# Altium PCB TIDA-00620.PcbDoc (part 2 of 2)
Units mil, origin at the board's own origin, x right, y up, seen from the top; angles counter-clockwise.
Board outline 3000 x 1500 mil, 2 copper layers (Top Layer, Bottom Layer), stack 64.8 mil thick; 82 components, 49 nets, 221 pads, 316 vias.
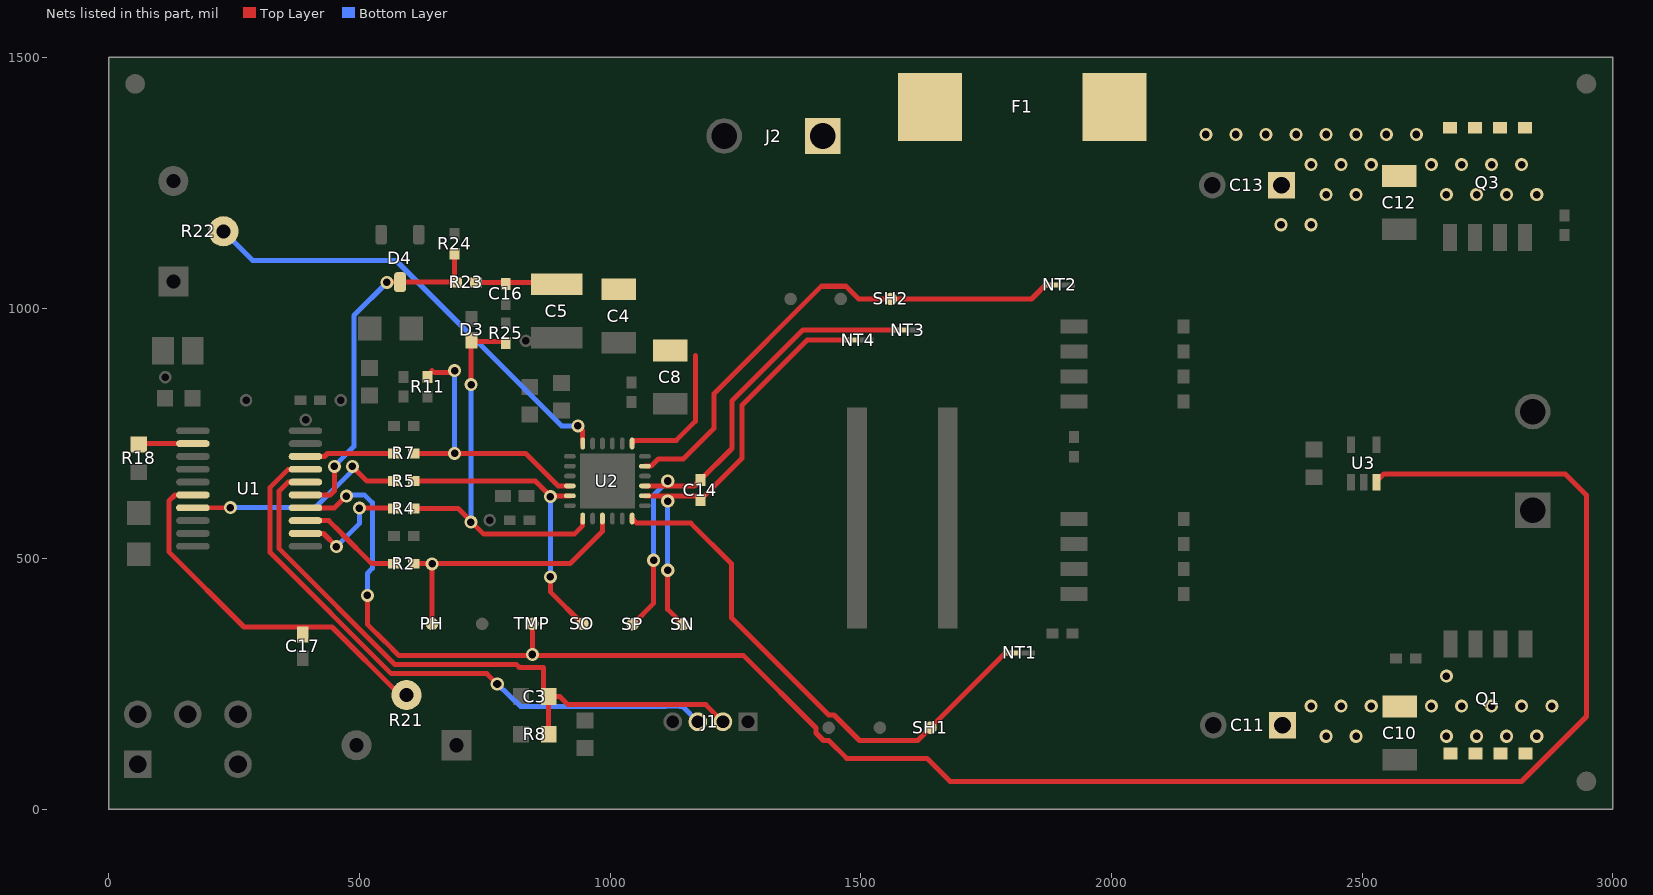
[diagram p2: the nets of this part, all layers, seen from the top]

## Via types
v1: diameter 26, hole 15, Top Layer to Bottom Layer, tented both sides, 270 vias
v2: diameter 26, hole 15, Top Layer to Bottom Layer, 39 vias
v3: diameter 19.68, hole 7.87, Top Layer to Bottom Layer, 5 vias
v4: diameter 40, hole 20, Top Layer to Bottom Layer, 1 vias
v5: diameter 26, hole 16, Top Layer to Bottom Layer, 1 vias

## Nets (pads, with @x,y where several pads share a name; then routed paths per layer and width w, separated by ;. In a path a pad name is that pad's centre, name@x,y a point inside that pad or via, vN(x,y) a via of type N, cw(c..) or ccw(c..) an arc to the next point about the centre after c; other vN are vias at no path point) (continued)
PH/IN1_DRV: PH.1 R2.1 U2.15 | length 546.6
  Top Layer w10: R2.1@610.32,490 920.24,490 984.84,554.6 U2.15@984.84,580.2 ; PH.1@645,370 v2(645,489.69)
PH/IN1_MSP: R2.2 U1.13 | length 210.9
  Top Layer w10: U1.13@392.52,576.02 438.98,576.02 464.63,550.37 ; 465.51,549.49 525,490 R2.2@569,490
RESET: C3.1 J1.2 R8.1 U1.16 | length 1301.2
  Top Layer w10: U1.16@392.52,652.8 357.8,652.8 340,635 340,520 571.25,288.75 813.81,288.75 819.43,283.13 866.87,283.13 C3.1@866.87,225 ; R8.1@877.56,150 C3.1@877.56,225 900,225 916.01,208.99 1191.01,208.99 J1.2@1225,175
S_N: C14.2 NT4.1 SN.1 U2.20 | length 874.3
  Top Layer w10: U2.20@1069.49,625.47 1171.84,625.47 C14.2@1180,617.31 1180.49,617.31 1202.72,639.54 1202.72,640.03 1262.91,700.23 1262.91,806.19 1392.72,936 NT4.1@1480,936 ; v2(1115,477) 1115,399 SN.1@1145,369
  Top Layer w15: v2(1115,615) v2@1115,622.66
  Bottom Layer w10: v2(1115,477) v2(1115,615)
S_P: C14.1 NT3.1 SP.1 U2.21 | length 1015.9
  Top Layer w10: SP.1@1045,369 1087,411 v2(1087,497) ; U2.21@1069.49,645.16 1168.47,645.16 C14.1@1180,656.68 ; C14.1@1179.09,656.09 1242,719 ; 1242.91,719.6 1242.91,814.47 1384.44,956 NT3.1@1579,956
  Top Layer w15: v2@1115,647.97 v2(1115,655)
  Bottom Layer w10: v2(1087,497) 1087,627 v2(1115,655)
SH1: NT1.1 SH1.1 U2.18 | length 1076.7
  Top Layer w10: U2.18@1043.9,580.2 1053.09,571 1161.18,571 1242.13,490.05 1242.13,382.15 1435.9,188.37 1446.63,188.37 1497.37,137.63 1613.63,137.63 1787.87,311.87 NT1.1@1801.87,311.87
SH2: NT2.2 SH2.1 U2.23 | length 1014.7
  Top Layer w10: U2.23@1069.49,684.53 1081.78,684.53 1096.25,699 1146,699 1207.17,760.17 1207.17,829.28 1421.26,1043.37 1470.51,1043.37 1495.88,1018 1828,1018 1828.13,1018.13 1840.4,1018.13 1868.28,1046 NT2.2@1873,1046
SLEEPN_DRV: D3.1 R4.1 R25.2 U2.13 | length 801.3
  Top Layer w10: R4.1@608.37,600 697.08,600 748.14,548.94 928.62,548.94 945.47,565.79 U2.13@945.47,580.2 ; v2(723,847) 723,933 R25.2@785.32,933
  Bottom Layer w10: v2@723,573.67 v2(723,847)
  other v2: 722.33,573
SLEEPN_MSP: R4.2 U1.12 | length 259.1
  Top Layer w10: U1.12@372.52,550.43 U1.12@392.52,550.43 428.57,550.43 454,525 v2(454,524) ; v2(500,601) R4.2@570,601
  Bottom Layer w10: v2(454,524) 500,570 v2(500,601)
SNSOUT_DRV: R7.1 R11.1 U2.10 | length 557.4
  Top Layer w10: R7.1@608.37,710 v2(690,710) 831.57,710 896.41,645.16 U2.10@919.88,645.16 ; R11.1@637,866.62 645.38,875 ; 649.41,871.13 686.13,871.13 v2(690,875)
  Bottom Layer w10: v2(690,710) v2(690,875)
SNSOUT_MSP: R7.2 U1.18 | length 179
  Top Layer w10: U1.18@392.52,703.98 430.38,703.98 436.41,710 R7.2@569,710
SO_DRV: R5.1 SO.1 U2.11 | length 598.3
  Top Layer w10: R5.1@610.32,655 851,655 856.47,649.53 ; 856.51,649.53 864.06,641.99 ; 864.06,641.94 880.53,625.47 U2.11@919.88,625.47 ; v2(881,464) 881,434 SO.1@945,370
  Bottom Layer w10: v2@881,465 v2@881,621
  other v2: 881,624
SO_MSP: R5.2 U1.7 | length 442.5
  Top Layer w10: U1.7@168.11,601.61 v2(243,602) ; v2(486,684) 515,655 R5.2@567.05,655
  Bottom Layer w10: v2(243,602) 399.92,601.92 ; 399,602 412.41,602 ; 412,602 v2@485.67,675.67
SPEED: C17.1 R21.2 U1.6 | length 746.6
  Top Layer w10: U1.6@168.11,627.2 132.2,627.2 120,615 120,514 270,364 445.44,364 581.44,228 R21.2@594,228
STATUS: R18.2 U1.2 | length 108.9
  Top Layer w10: R18.2@60,731.5 61.93,729.57 U1.2@168.11,729.57
"TEMP SENSOR": TMP.1 U1.14 U3.3 | length 3967
  Top Layer w10: U1.14@392.52,601.61 450.61,601.61 v2(474,625) ; v2(516,427) 516,369.28 550.14,335.14 550.48,335.14 579,306.62 v2@845,306.62 ; TMP.1@845,370 v2@845,306.62 ; U3.3@2526.47,652.47 2543,669 2904.87,669.13 2947.13,626.87 2947.13,185.4 2817.6,55.88 1678.12,55.88 1632.12,101.88 1471.84,101.88 1436.1,137.63 1425.49,137.63 1410.63,152.49 1410.63,162.37 1266.38,306.62 v2@845,306.62
  Bottom Layer w10: v2(474,625) 475.87,626.87 510.72,626.87 525.87,611.72 525.87,480.78 515.81,470.72 515.81,427.19 v2(516,427)
  other v2: 845,309
TEST: J1.3 U1.17 | length 1208.3
  Top Layer w10: U1.17@392.52,678.39 358.11,678.39 322.13,642.4 322.13,512.6 563.85,270.87 754.13,270.87 v5(775,250)
  Bottom Layer w10: v5(775,250) 821.83,205.31 1110.65,205.31 1111.92,206.57 1138.08,206.57 1139.35,205.31 1144.69,205.31 J1.3@1175,175
VBAT: F1.1 J2.1
"VBAT MONITOR": D4.3 R23.2 R24.1 U1.15 | length 705.8
  Top Layer w10: U1.15@392.52,627.2 442.2,627.2 450,635 v2(450,684) ; v2@555.76,1051.76 D4.3@581,1051.76 R23.2@688.62,1051.76 ; R23.2@689.38,1051 R24.1@689.38,1103.76
  Bottom Layer w10: v2(450,684) 450,684.59 489.13,723.72 489.13,985.13 v2(555,1051)
VM: C4.1 C5.1 C8.1 C10.1 C11.1 C12.1 C13.1 C16.2 F1.2 Q1.5 Q1.6 Q1.7 Q1.8 Q3.5 Q3.6 Q3.7 Q3.8 R23.1 U2.1 | length 432.7
  Top Layer w10: R23.1@736.62,1051 C5.1@893.91,1051 ; U2.1@1043.9,729.8 1050.09,736 1132,736 1170,774 1170,905
  other v1: 2428,146 2488,146 2668,146 2728,146 2788,146 2848,146 2398,206 2458,206 2518,206 2638,206 2698,206 2758,206 2818,206 2878,206 2668,266 2338,1166 2398,1166 2428,1226 2488,1226 2668,1226 2728,1226 2788,1226 2848,1226 2398,1286 2458,1286 2518,1286 2638,1286 2698,1286 2758,1286 2818,1286 2188,1346 2248,1346 2308,1346 2368,1346 2428,1346 2488,1346 2548,1346 2608,1346
VREF: R22.2 U2.6 | length 906.8
  Top Layer w10: v2(936,765) 945.47,755.53 U2.6@945.47,729.8
  Bottom Layer w10: R22.2@229,1153 287.25,1094.75 573.12,1094.75 903,765 v2(936,765)
pads on no net: FID1.1 FID2.1 FID3.1 S1.1 S1.3 U1.3 U1.4 U1.8 U1.10 U1.19

## Polygon pours and split planes (outlines as drawn)
M_B on Bottom Layer "Bottom Layer-No Net 5" (solid, remove dead copper, pour order 32): 2434,706 2996.48,706 2997.48,705 2998,705.52 2998,1155 2418,1155
M_A on Bottom Layer "Bottom Layer-No Net 4" (solid, remove dead copper, pour order 30): 2444,272 2444,671 3001,671 3001,281 3002,280 2999,277 2426,277
VM on Bottom Layer "Bottom Layer-No Net 3" (solid, remove dead copper, pour order 39): 2068,1504.59 2068,4 2525,4 2528,7 2532,3 3000,3 3000,281 2999,282 3001,284 3001,295 2460,295 2459,294 2460,295 2460,1176 2994,1176 2999,1181 3000,1182 3000,1500
GND on Bottom Layer "Bottom Layer-No Net" (solid, remove dead copper, pour order 45): 2.8,1481.73 2119,1481.73 2119,-6 2.8,-6
VM on Top Layer "Top Layer-No Net 1" (solid, remove dead copper, pour order 38): 1084.57,891 1166,891 1169,894 1172,891 1172,825 1177,825 1198,846 1558,1206 1326,1206 1325,1207 870,1207 869,1207 839,1177 840,1176 840,1024 840,1001 1017,1001 1056,1001 1085.23,971.77
M_B on Top Layer "Top Layer-No Net 8" (solid, remove dead copper, pour order 35): 1980,693 1979,694 1979,1064 2128.81,1064 2154.81,1090 2437.81,1090 2516.91,1169.1 2518.83,1167.19 2997,1167.19 2997,694.19 3002,689.19
M_A on Top Layer "Top Layer-No Net" (solid, pour order 33): 1979,602 1979,297 1983,293 2947.13,293 2947.13,664.87 2939,673 2933,679 2387,679 1982,679 1979,682
VM on Top Layer "Bottom Layer-No Net 2" (solid, remove dead copper, pour order 28): 1837,1501.01 1837,1200 1970,1333 2266,1333 2276,1343 2272,1339 2276,1339 2275,1338 2275,1089.87 2452.87,1089.87 2515.91,1152.91 2583.35,1152.91 2609.43,1179 3000,1179 3000,1500
VM on Top Layer "Bottom Layer-No Net 1" (solid, remove dead copper, pour order 27): 2286,73.75 2286,294 2621,294 2625,290 2944,290 2945,291 2947.13,288.87 2947.13,85.41 2917.6,55.88 2915.72,54 2285,54
VBAT on Top Layer "Top Layer-No Net 7" (solid, remove dead copper, pour order 26): 1336,1497 1336,1229.12 1593,1229.12 1719.12,1229.12 1812,1322 1812,1495.77
GND on Top Layer "Top Layer-No Net 4" (solid, remove dead copper, pour order 43): -0.31,1509.95 -0.31,9.95 2999.69,9.95 2999.69,1509.95
NetNT3_2 on Top Layer "Top Layer-No Net 5" (solid, remove dead copper, pour order 40): 1597,319.2 1597,990 1950.54,990 1950.54,397.32 1878.24,397.32 1875.24,400.32 1795.11,320.2
VM on Top Layer "Top Layer-No Net 2" (solid, remove dead copper, pour order 14): 1989.81,1509.81 1736,1256 1685,1256 1584,1256 1396.25,1068.25 1430.5,1034 1644,1034 1671,1034 2018.81,1381.81

## Keep-outs
Keep-Out Layer:
  lines w10: 0,1500 3000,1500 3000,0 0,0 0,1500 ; 0,1500 0,1500 ; 3000,1440 3000,1440
  text ".Layer_Name" at 577,-858.49 h60

## Other copper
Top Layer:
  rectangle net VM: 2244,1333 2298,1384
  rectangle net NetNT3_2: 1597,918.93 1631,970
  rectangle net GND: 1511,916 1512,917
  rectangle net GND: 1503,892 1572,941
  rectangle net VM: 1084.57,891 1091.67,916
  text ".Layer_Name" at 577,-858.49 h60
Bottom Layer:
  rectangle net NetNT3_2: 1597,305 1873,995
  rectangle net M_A: 1980,324 2162,679
  rectangle net M_B: 1978,702 2162,1026.98
  text ".Layer_Name" at 577,-858.49 h60

## Silkscreen, mask and mechanical layers (free items; w line width, h text height)
Top Overlay:
  lines w10: 595,340 1195,340 1195,439 595,439 595,379 595,340 ; 1290,985 1638,985 1638,1100 1290,1100 1290,985 ; 1359,135 1720,135 1720,250 1359,250 1359,135
  text "GND" at 972,1158 h40
  text "VBAT" at 1546,1157 h40
  text "VREF" at 371,1096 h30 r90
  text "FAULTn" at 304,940 h30
  text "MOTB" at 2505,788 h30
  text "MOTA" at 2506,570 h30
  text "STATUS" at 146,336 h30 r90
  text "SPEED" at 419,333 h30
  text "DIRECTION" at 32,253 h30
  text "TIDA-00620 Rev E1" at 1408,45 h40
  text ".Layer_Name" at 577,-858.49 h60
Bottom Overlay:
  text ".Layer_Name" at 577,-858.49 h60
Top Paste:
  text ".Layer_Name" at 577,-858.49 h60
Bottom Paste:
  text ".Layer_Name" at 577,-858.49 h60
Top Solder:
  text ".Layer_Name" at 577,-858.49 h60
  text ".Layer_Name" at 577,-858.49 h60
Bottom Solder:
  text ".Layer_Name" at 577,-858.49 h60
Drill Guide:
  text ".Layer_Name" at 577,-858.49 h60
M1 Board Outline:
  lines w10: 0,0 0,1500 ; 0,0 0,0 ; 0,0 3000,0 3000,1500 ; 0,1500 0,1500 ; 0,1500 3000,1500 ; 3000,1500 3000,1500
  text ".Layer_Name" at 577,-858.49 h60
M2 Board Dimensions:
  rectangle: 0,-275 125,-150
  rectangle: 125,-400 500,-275
  lines w7: 0,-275 1000,-275 ; 125,-400 125,-150 ; 250,-400 250,-150 ; 500,-400 500,-150 ; 750,-400 750,-150 ; 0,-400 1000,-400 1000,-150 0,-150 0,-400
  text ".Layer_Name" at 577,-858.49 h60
M3 3D STEP Top:
  text ".Layer_Name" at 577,-858.49 h60
M4 3D STEP Bottom:
  text ".Layer_Name" at 577,-858.49 h60
M5 Assembly Top:
  lines w10: -292,-930.17 6308,-930.17 ; -292,-726.83 6310,-726.83 ; -292,-523.5 -292,-1133.5 3713,-1133.5 6310,-1133.5 6310,-523.5 -291.5,-523.5 -291.5,-1133.5 1284,-1133.5 ; 2173,-1133.5 2173,-523.5 ; 3440,-726.83 3440,-523.5 ; 4280,-726.83 4280,-523.5 ; 4902,-1140 4902,-937.17
  text "COMPONENTS MARKED 'DNP' SHOULD NOT BE POPULATED." at 1153.5,-318.5 h60
  text "ASSEMBLY VARIANT:" at 1153,-434 h60
  text ".VariantName" at 2189,-434 h60
  text "PCB VIEWED FROM TOP SIDE" at -228.5,-655.67 h60
  text "BOARD #:" at 2248,-655.67 h60
  text ".PRJ_Number" at 2793.5,-655.67 h60
  text "REV:" at 3638,-655.67 h60
  text ".PCB_Rev" at 3929.5,-655.67 h60
  text "SVN REV:" at 4476,-655.67 h60
  text ".VersionControl_RevNumber" at 4982,-655.67 h60
  text "TID #:" at 2248,-859 h60
  text ".TID" at 2793.5,-859 h60
  text "PLOT NAME =" at -228.5,-1064.34 h60
  text ".plot_File_Name" at 577,-1064.34 h60
  text "GENERATED    :" at 2250,-1064.34 h60
  text ".Print_Date" at 3119.5,-1064.34 h60
  text ".Print_Time" at 3848.5,-1064.34 h60
  text "TEXAS INSTRUMENTS" at 5113,-1064.34 h60
M6 Assembly Bottom:
  lines w10: -292.5,-727.33 6309.5,-727.33 ; -290.5,-930.67 6309.5,-930.67 ; 1115.5,-1140.5 1115.5,-937.67 ; 1737.5,-727.33 1737.5,-524 ; 2577.5,-727.33 2577.5,-524 ; 3844.5,-1134 3844.5,-524 ; 4733.5,-1134 6309,-1134 6309,-524 -292.5,-524 -292.5,-1134 2304.5,-1134 6309.5,-1134 6309.5,-524
  text "COMPONENTS MARKED 'DNP' SHOULD NOT BE POPULATED." at 6102,-318 h60
  text ".VariantName" at 5058,-434 h60
  text "ASSEMBLY VARIANT:" at 6097,-434 h60
  text ".VersionControl_RevNumber" at 1035.5,-656.17 h60
  text "SVN REV:" at 1541.5,-656.17 h60
  text ".PCB_Rev" at 2088,-656.17 h60
  text "REV:" at 2379.5,-656.17 h60
  text ".PRJ_Number" at 3224,-656.17 h60
  text "BOARD #:" at 3769.5,-656.17 h60
  text "PCB VIEWED FROM BOTTOM SIDE" at 6246,-656.17 h60
  text ".PRJ_Number" at 3224,-859.5 h60
  text "TID #:" at 3769.5,-859.5 h60
  text "TEXAS INSTRUMENTS" at 904.5,-1064.84 h60
  text ".Print_Time" at 2169,-1064.84 h60
  text ".Print_Date" at 2898,-1064.84 h60
  text "GENERATED    :" at 3767.5,-1064.84 h60
  text ".plot_File_Name" at 5440.5,-1064.84 h60
  text "PLOT NAME =" at 6246,-1064.84 h60
M9 Title Sheet:
  drawing of 57 lines, arcs and shapes, not listed
  text "1" at 739.84,8036.5 h70
  text "2" at 3235.5,8036.5 h70
  text "3" at 5724.84,8036.5 h70
  text "4" at 8231.51,8036.5 h70
  text "5" at 10730.5,8036.5 h70
  text "6" at 13235.5,8036.5 h70
  text "A" at -416.5,6893.5 h70
  text "A" at 14383.5,6893.5 h70
  text "B" at -416.5,4513.5 h70
  text "B" at 14383.5,4513.5 h70
  text "C" at -416.5,2138.5 h70
  text "C" at 14383.5,2138.5 h70
  text "PROJECT TITLE:" at 11343.5,277.5 h45
  text ".PRJ_Title" at 11393.5,144.17 h70
  text "DESIGNED FOR:" at 11343.5,-23.5 h45
  text ".PRJ_Customer" at 11393.5,-163.5 h70
  text "D" at -416.5,-231.5 h70
  text "D" at 14383.5,-231.5 h70
  text "FILE NAME:" at 11343.5,-323.5 h45
  text ".PCB_File_Name_No_Path" at 11393.5,-443.5 h70
  text "Texas Instruments (TI) and/or its licensors do not warrant the accuracy or completeness of this specification" at 6374,-605.34 h45
  text "ENGINEER:" at 11343.5,-613.5 h45
  text "LAYOUT BY:" at 12848.5,-613.5 h45
  text "or any information contained therein. TI and/or its licensors do not warrant that this design will meet" at 6329.01,-718 h45
  text ".PRJ_Engineer" at 11393.5,-768.49 h70
  text ".PCB_Layout" at 12899,-768.49 h70
  text "the specifications, will be suitable for your application or fit for any particular purpose, or will operate in" at 6329.01,-830.67 h45
  text ".Layer_Name" at 577,-858.49 h60
  text "ALTIUM DESIGNER VERSION:" at 12848.5,-923.5 h45
  text "an implementation. TI and/or its licensors do not warrant that the design is production worthy. You should" at 6329.01,-943.33 h45
  text "completely validate and test your design implementation to confirm the system functionality for your application." at 6374,-1056 h45
  text ".print_Scale" at 11393.5,-1056.83 h70
  text ".Application_BuildNumber" at 12899,-1056.83 h70
  text "1" at 739.84,-1263.5 h70
  text "2" at 3235.5,-1263.5 h70
  text "3" at 5724.84,-1263.5 h70
  text "4" at 8231.51,-1263.5 h70
  text "5" at 10730.5,-1263.5 h70
  text "6" at 13235.5,-1263.5 h70
M10 Fab Notes:
  drawing of 185 lines, arcs and shapes, not listed
  text "DESIGN INFORMATION" at 12381.02,5910 h60
  text "MIN. TRACK WIDTH:" at 11736.46,5730 h60
  text "8" at 12832.7,5730 h60
  text "MIL" at 12987.46,5730 h60
  text "MIN. CLEARANCE:" at 11736.46,5598 h60
  text "0.2" at 12772.7,5598 h60
  text "mm" at 12987.46,5598 h60
  text "MIN. VIA PAD SIZE:" at 11736.46,5466 h60
  text "24" at 12802.71,5466 h60
  text "MIL" at 12987.46,5466 h60
  text "0.05mm (2MIL)" at 12431.46,5324.29 h60
  text "MINIMUM ANNULAR RING" at 11407.23,5320 h60
  text "EXTERNAL" at 13139.46,5320 h60
  text "PER" at 11607.23,5202 h60
  text "IPC-D-275 CLASS 2 LEVEL C" at 11827.23,5202 h60
  text "MIL, HOLES" at 13315.46,5089.71 h60
  text "+/-" at 12923,5089 h60
  text "+/-" at 13777,5089 h60
  text "REGISTRATION TOLERANCES:" at 11407.23,5084 h60
  text "METAL" at 12607,5084 h60
  text "5" at 13183.2,5084 h60
  text "3" at 14016.2,5084 h60
  text "MIL" at 14132.46,5084 h60
  text "MATERIAL:" at 11332.46,4874.54 h60
  text "FR-4 High Tg" at 12318.9,4734.21 h60
  text "FR-408" at 11753.46,4725.64 h60
  text "X" at 12165.46,4725.64 h60
  text "OTHER" at 13241.46,4725.64 h60
  text "62 MIL (1.6mm) +/-10%" at 12073.56,4562.92 h60
  text "THICKNESS:" at 11407.23,4558.64 h60
  text "X" at 11945.4,4558.64 h60
  text "OTHER" at 13358.46,4558.64 h60
  text "TOLERANCE:" at 11407.23,4400.64 h60
  text "X" at 12246.53,4400.64 h60
  text "ANSI IPC-6012 TYPE 3 CLASS 2" at 12433.48,4400.64 h60
  text "OTHER +/-" at 12433.46,4244.64 h60
  text "BOW & TWIST:" at 11407.23,4087.64 h60
  text "X" at 12246.53,4087.64 h60
  text "ANSI IPC-6012 TYPE 3 CLASS 2" at 12433.48,4087.64 h60
  text "OTHER +/-" at 12433.46,3929.13 h60
  text "DRILLING:" at 11332.46,3790.64 h60
  text "REFERENCE:" at 11407.23,3673.64 h60
  text "X" at 12055.46,3673.64 h60
  text "AS SHOWN" at 12242.46,3673.64 h60
  text "X" at 12956.46,3673.64 h60
  text "NC_DRILL FILES" at 13093.46,3673.64 h60
  text "PTH MIN COPPER THICKNESS:" at 11407.23,3515.64 h60
  text "X" at 12757.46,3515.64 h60
  text "1MIL" at 12894.46,3515.64 h60
  text "OTHER" at 13391.46,3515.64 h60
  text "BOARD FINISH:" at 11332.46,3356.64 h60
  text "SILKSCREEN:" at 11487.68,3238.64 h60
  text "X" at 12436.46,3238.64 h60
  text "TOP" at 12562.46,3238.64 h60
  text "X" at 12946.46,3238.64 h60
  text "BOTTOM" at 13073.46,3238.64 h60
  text "SILKSCREEN COLOR:" at 11487.68,3071.64 h60
  text "X" at 12435.42,3071.64 h60
  text "WHITE" at 12562.46,3071.64 h60
  text "OTHER" at 13073.46,3071.64 h60
  text "SOLDER RESIST COLOR:" at 11487.68,2901.64 h60
  text "X" at 12055.42,2742.44 h60
  text "GREEN" at 12182.46,2742.44 h60
  text "BLUE" at 12773.46,2742.44 h60
  text "OTHER" at 13311.46,2742.44 h60
  text "IMMERSION GOLD (ENIG)" at 12393.46,2553.92 h60
  text "ENEPIG" at 13731,2550.64 h60
  text "SURFACE FINISH:" at 11332.46,2549.64 h60
  text "X" at 12206.51,2549.64 h60
  text "IMM. TIN/SILVER OR EQUIV" at 11662,2392.64 h60
  text "OTHER" at 13093.46,2392.64 h60
  text "ARRAY/PANEL:" at 11332.46,2213.64 h60
  text "CUT AND TRIM PER MECH LAYER 1" at 12393.46,2209.35 h60
  text "N.C. ROUTE" at 12393.46,2057.64 h60
  text "X" at 13072.46,2057.64 h60
  text "V. SCORE" at 13259.46,2057.64 h60
  text "CERTIFICATION:" at 11332.46,1920.64 h60
  text "MATERIALS AND WORKMANSHIP FOR ALL PCBS" at 12057.46,1920.64 h60
  text "TO MEET OR EXCEED THE REQUIREMENTS OF:" at 12057.46,1822.64 h60
  text "X" at 11683.96,1686.13 h60
  text "ANSI IPC-A-600F CLASS ->" at 11822.96,1686.13 h60
  text "X" at 13462.02,1686.13 h60
  text "2" at 13580.96,1686.14 h60
  text "1" at 13265.96,1684.64 h60
  text "3" at 13934.96,1684.64 h60
  text "X" at 11686.02,1526.64 h60
  text "UL 94V-0" at 11822.96,1526.64 h60
  text "X" at 12498.02,1526.64 h60
  text "RoHS" at 12634.96,1526.64 h60
  text "OTHER" at 13279.36,1526.64 h60
  text "PER ORDER" at 13676.42,1526.64 h60
  text "ADDITIONAL REQUIREMENTS:" at 11332.46,1385.64 h60
  text "MICROSECTION:" at 11407.23,1270.64 h60
  text "YES" at 12312.96,1270.64 h60
  text "REQUIRED" at 13174.46,1114.49 h60
  text "BARE BOARD ELEC. TEST:" at 11407.23,1111.64 h60
  text "NONE" at 12712.96,1111.64 h60
  text "X" at 13047.46,1111.64 h60
  text "PER ORDER" at 13766.46,1111.64 h60
  text "MANUFACTURER'S UL:" at 11407.23,954.64 h60
  text "RAIL" at 12572.96,950.35 h60
  text "METAL" at 13064.77,950.35 h60
  text "X" at 13440,950 h60
  text "SILK" at 13576.46,950.35 h60
  text ".Layer_Name" at 577,-858.49 h60
M11 Gerber Information:
  lines w10: -292,-930.17 6308,-930.17 ; -292,-726.83 6310,-726.83 ; -292,-523.5 -292,-1133.5 3713,-1133.5 6310,-1133.5 6310,-523.5 -291.5,-523.5 -291.5,-1133.5 1284,-1133.5 ; 2173,-1133.5 2173,-523.5 ; 3440,-726.83 3440,-523.5 ; 4280,-726.83 4280,-523.5 ; 4902,-1140 4902,-937.17
  text "ALL ARTWORK VIEWED FROM TOP SIDE" at -228.5,-655.67 h60
  text "BOARD #:" at 2248,-655.67 h60
  text ".PRJ_Number" at 2793.5,-655.67 h60
  text "REV:" at 3638,-655.67 h60
  text ".PCB_Rev" at 3929.5,-655.67 h60
  text "SVN REV:" at 4476,-655.67 h60
  text ".VersionControl_RevNumber" at 4982,-655.67 h60
  text "LAYER NAME =" at -228.5,-858.49 h60
  text "TID #:" at 2248,-859 h60
  text ".TID" at 2793.5,-859 h60
  text "PLOT NAME =" at -228.5,-1064.34 h60
  text ".plot_File_Name" at 577,-1064.34 h60
  text "GENERATED    :" at 2250,-1064.34 h60
  text ".Print_Date" at 3119.5,-1064.34 h60
  text ".Print_Time" at 3848.5,-1064.34 h60
  text "TEXAS INSTRUMENTS" at 5113,-1064.34 h60
M12 Stackup:
  drawing of 191 lines, arcs and shapes, not listed
  text "Layer" at 9763.34,7818 h60
  text "Name" at 10173.26,7818 h60
  text "Material" at 11103,7818 h60
  text "Thickness" at 11962.77,7818 h60
  text "Constant" at 12612.6,7818 h60
  text "Board Layer Stack" at 13182.46,7818 h60
  text "1" at 9763.34,7698 h60
  text "Top Overlay" at 10173.26,7698 h60
  text "2" at 9763.34,7578 h60
  text "Top Solder" at 10173.26,7578 h60
  text "Solder Resist" at 11103,7578 h60
  text "0.40mil" at 11962.77,7578 h60
  text "3.5" at 12612.6,7578 h60
  text "3" at 9763.34,7458 h60
  text "Top Layer" at 10173.26,7458 h60
  text "Copper" at 11103,7458 h60
  text "2.80mil" at 11962.77,7458 h60
  text "4" at 9763.34,7338 h60
  text "Dielectric1" at 10173.26,7338 h60
  text "FR-4" at 11103,7338 h60
  text "59.20mil" at 11962.77,7338 h60
  text "4.8" at 12612.6,7338 h60
  text "5" at 9763.34,7218 h60
  text "Bottom Layer" at 10173.26,7218 h60
  text "Copper" at 11103,7218 h60
  text "2.80mil" at 11962.77,7218 h60
  text "6" at 9763.34,7098 h60
  text "Bottom Solder" at 10173.26,7098 h60
  text "Solder Resist" at 11103,7098 h60
  text "0.40mil" at 11962.77,7098 h60
  text "3.5" at 12612.6,7098 h60
  text "7" at 9763.34,6978 h60
  text "Bottom Overlay" at 10173.26,6978 h60
  text ".Layer_Name" at 577,-858.49 h60
M13 Component Bodies Top:
  text ".Layer_Name" at 577,-858.49 h60
M14 Component Bodies Bottom:
  text ".Layer_Name" at 577,-858.49 h60
M15 Courtyards Top:
  text ".Layer_Name" at 577,-858.49 h60
M16 Courtyards Bottom:
  text ".Layer_Name" at 577,-858.49 h60
Drill Drawing:
  circle w1: c5677.9,3258.91 r20.77
  lines w1: 5657.13,2241.16 5657.13,2251.55 5667.51,2261.93 5657.13,2272.32 5657.13,2282.7 5667.51,2282.7 5677.9,2272.32 5688.28,2282.7 5698.67,2282.7 5698.67,2272.32 5688.28,2261.93 5698.67,2251.55 5698.67,2241.16 5688.28,2241.16 5677.9,2251.55 5667.51,2241.16 5657.13,2241.16 ; 5657.13,2376.17 5667.51,2376.17 5667.51,2365.79 5688.28,2365.79 5688.28,2376.17 5698.67,2376.17 5698.67,2396.94 5688.28,2396.94 5688.28,2407.33 5667.51,2407.33 5667.51,2396.94 5657.13,2396.94 5657.13,2376.17 ; 5657.13,2490.41 5677.9,2500.79 5698.67,2490.41 5688.28,2511.18 5698.67,2531.95 5677.9,2521.56 5657.13,2531.95 5667.51,2511.18 5657.13,2490.41 ; 5657.13,2625.42 5667.51,2625.42 5677.9,2615.03 5688.28,2625.42 5698.67,2625.42 5688.28,2635.8 5698.67,2646.19 5688.28,2646.19 5677.9,2656.57 5667.51,2646.19 5657.13,2646.19 5667.51,2635.8 5657.13,2625.42 ; 5657.13,2781.19 5698.67,2781.19 5677.9,2739.65 5657.13,2781.19 ; 5657.13,2864.27 5698.67,2864.27 5698.67,2905.82 5657.13,2905.82 5657.13,2864.27 ; 5657.13,3009.67 5677.9,2988.9 5698.67,3009.67 5677.9,3030.44 5657.13,3009.67 ; 5657.13,3113.52 5698.67,3113.52 5698.67,3155.06 5657.13,3155.06 5657.13,3113.52 ; 5665.44,2872.58 5690.36,2872.58 5690.36,2897.51 5665.44,2897.51 5665.44,2872.58
  lines w12: 5600,2203.78 7629.11,2203.78 ; 5600,3325.38 7629.11,3325.38 ; 5948.13,2079.15 5948.13,3450 ; 6290.32,2079.15 6290.32,3450 ; 6937.06,2079.15 6937.06,3450 ; 7206.38,2079.15 7206.38,3450 ; 5600,2079.15 7629.11,2079.15 7629.11,3450 5600,3450 5600,2079.15
  text "Symbol" at 5674.77,3362.76 h72
  text "Quantity" at 5985.52,3362.76 h72
  text "Finished Hole Size" at 6327.7,3362.76 h72
  text "Plated" at 6974.45,3362.76 h72
  text "Hole Type" at 7243.77,3362.76 h72
  text "5" at 5985.52,3238.14 h60
  text "7.87mil (0.200mm)" at 6327.7,3238.14 h60
  text "PTH" at 6974.45,3238.14 h60
  text "Round" at 7243.77,3238.14 h60
  text "315" at 5985.52,3113.52 h60
  text "15.00mil (0.381mm)" at 6327.7,3113.52 h60
  text "PTH" at 6974.45,3113.52 h60
  text "Round" at 7243.77,3113.52 h60
  text "1" at 5985.52,2988.9 h60
  text "16.00mil (0.406mm)" at 6327.7,2988.9 h60
  text "PTH" at 6974.45,2988.9 h60
  text "Round" at 7243.77,2988.9 h60
  text "1" at 5985.52,2864.27 h60
  text "20.00mil (0.508mm)" at 6327.7,2864.27 h60
  text "PTH" at 6974.45,2864.27 h60
  text "Round" at 7243.77,2864.27 h60
  text "4" at 5985.52,2739.65 h60
  text "25.59mil (0.650mm)" at 6327.7,2739.65 h60
  text "PTH" at 6974.45,2739.65 h60
  text "Round" at 7243.77,2739.65 h60
  text "6" at 5985.52,2615.03 h60
  text "28.00mil (0.711mm)" at 6327.7,2615.03 h60
  text "PTH" at 6974.45,2615.03 h60
  text "Round" at 7243.77,2615.03 h60
  text "4" at 5985.52,2490.41 h60
  text "33.46mil (0.850mm)" at 6327.7,2490.41 h60
  text "PTH" at 6974.45,2490.41 h60
  text "Round" at 7243.77,2490.41 h60
  text "5" at 5985.52,2365.79 h60
  text "35.43mil (0.900mm)" at 6327.7,2365.79 h60
  text "PTH" at 6974.45,2365.79 h60
  text "Round" at 7243.77,2365.79 h60
  text "4" at 5985.52,2241.16 h60
  text "51.18mil (1.300mm)" at 6327.7,2241.16 h60
  text "PTH" at 6974.45,2241.16 h60
  text "Round" at 7243.77,2241.16 h60
  text "345 Total" at 5985.52,2116.54 h60
  text ".Layer_Name" at 577,-858.49 h60

## Dimensions
0,-400 to 1000,-400 on M2 Board Dimensions
0,0 to 3000,-30 on M2 Board Dimensions
0,0 to -20,1500 on M2 Board Dimensions

## Text inside footprints (layer, text, board x,y; h text height)
C11: Top Overlay "+" at 2502,198 h60 r180; M5 Assembly Top "+" at 2502,198 h60 r180
C13: Top Overlay "+" at 2500,1275 h60 r180; M5 Assembly Top "+" at 2500,1275 h60 r180
Logo2: Top Overlay "Pb" at 1905.4,156.1 h60